# EAGLE board ALU (EAGLE 9.6.2)
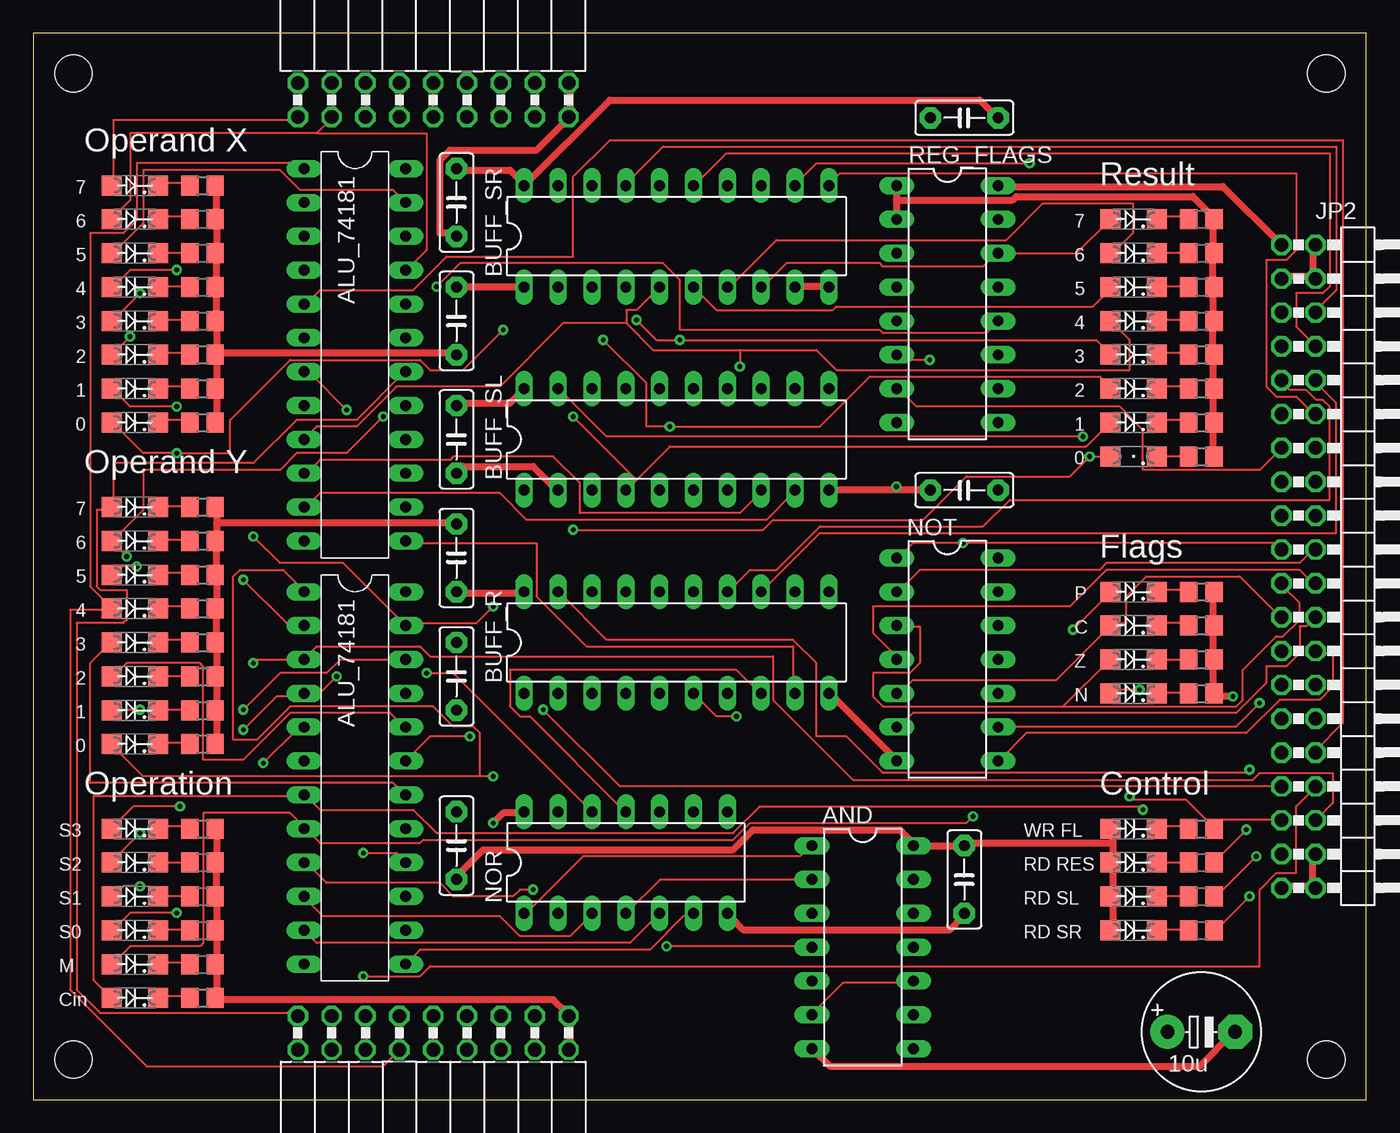
[diagram p0: board, top side]
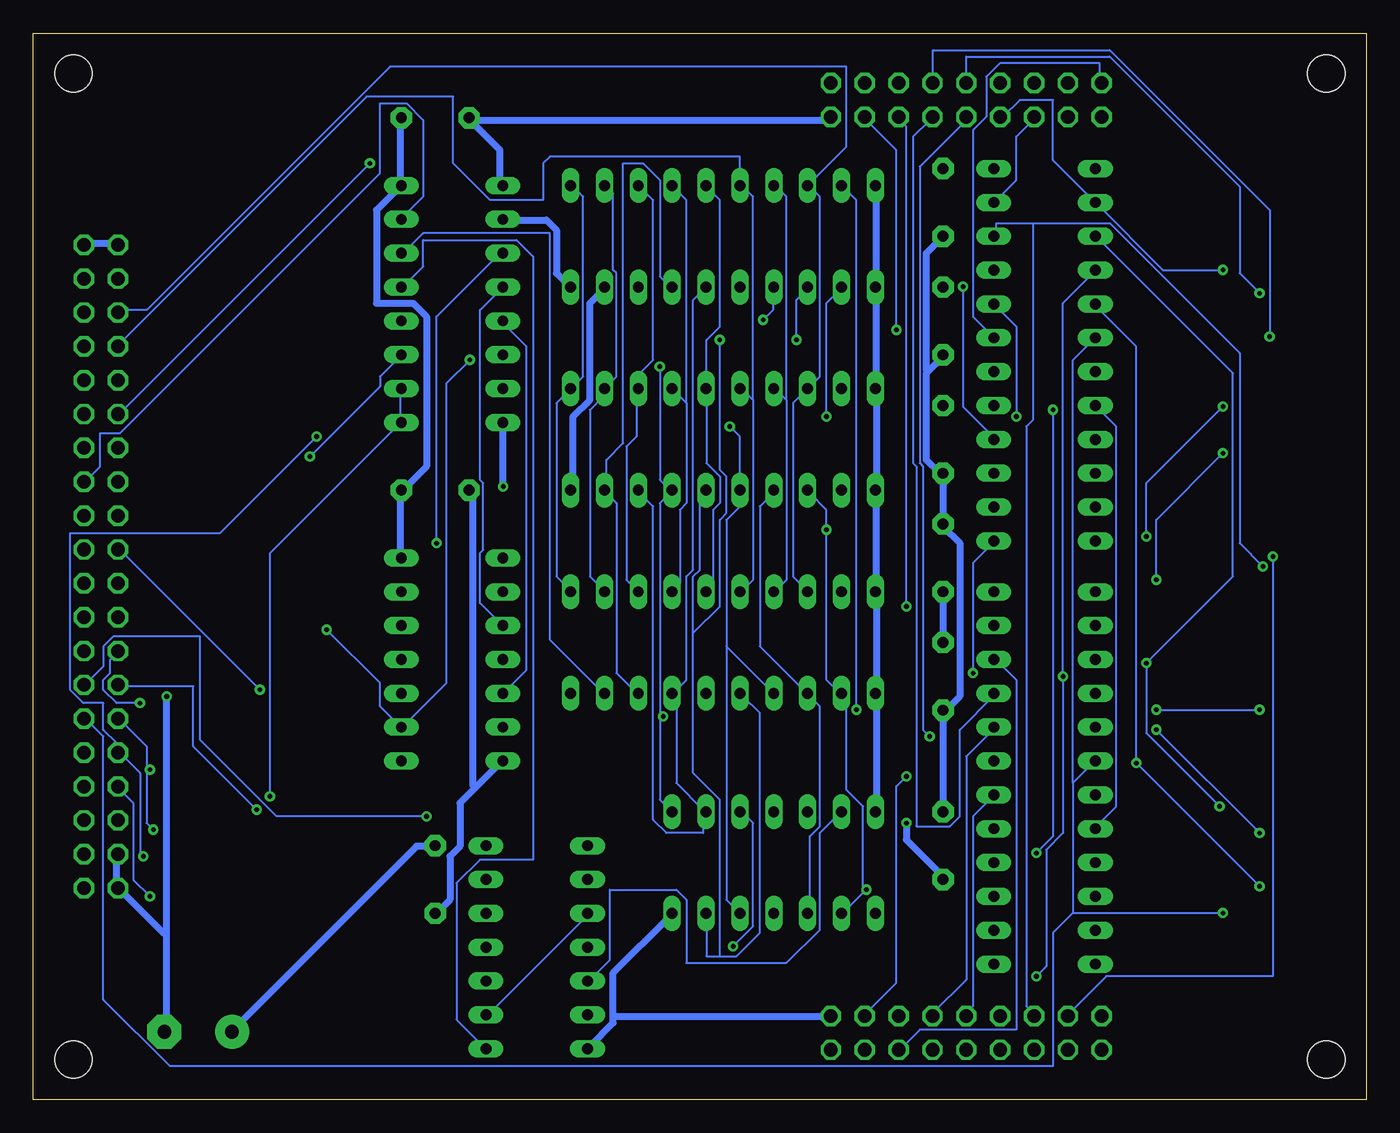
[diagram p1: board, bottom side, seen from below]

Size 100 x 80 mm. Coordinates in mm from the lower left corner, seen from the top.
Outline: 0,0 100,0 100,80 0,80 0,0
Copper layers (1*16): Top 0.035mm / dielectric 1.5mm / Bottom 0.035mm
Design rules "default": minimum track width 6mil, minimum drill 0.35mm, track to track 6mil, track to pad 6mil, pad to pad 6mil, via to via 6mil, smd to smd 6mil, copper to edge 40mil, drill to drill 6mil, minimum pad ring 10mil, minimum via ring 8mil, stop-mask expansion 4mil, vias tented up to drill 0mil, thermal gap 10mil
Net classes: 1 supply: width 0.508 mm
Holes 2.8 mm at 3,77 97,77 3,3 97,3

## Footprints (pad centres in the part's own frame; a part is rotated, then mirrored left to right if it is on the bottom)
ALU_74181 = drill 0.813 pad 1.321 long: A0 -3.81,11.43; A1 3.81,11.43; A2 3.81,6.35; A3 3.81,1.27; A=B 3.81,-11.43; B0 -3.81,13.97; B1 3.81,8.89; B2 3.81,3.81; B3 3.81,-1.27; CN -3.81,-1.27; COUT 3.81,-6.35; F0 -3.81,-6.35; F1 -3.81,-8.89; F2 -3.81,-11.43; F3 3.81,-13.97; G 3.81,-3.81; GND -3.81,-13.97; M -3.81,-3.81; P 3.81,-8.89; S0 -3.81,1.27; S1 -3.81,3.81; S2 -3.81,6.35; S3 -3.81,8.89; VCC 3.81,13.97
DIL14 = drill 0.813 long: 1 -7.62,-3.81; 2 -5.08,-3.81; 3 -2.54,-3.81; 4 0,-3.81; 5 2.54,-3.81; 6 5.08,-3.81; 7 7.62,-3.81; 8 7.62,3.81; 9 5.08,3.81; 10 2.54,3.81; 11 0,3.81; 12 -2.54,3.81; 13 -5.08,3.81; 14 -7.62,3.81
FE09-2W = drill 1.016 octagon: 1 -10.16,1.27; 2 -10.16,-1.27; 3 -7.62,1.27; 4 -7.62,-1.27; 5 -5.08,1.27; 6 -5.08,-1.27; 7 -2.54,1.27; 8 -2.54,-1.27; 9 0,1.27; 10 0,-1.27; 11 2.54,1.27; 12 2.54,-1.27; 13 5.08,1.27; 14 5.08,-1.27; 15 7.62,1.27; 16 7.62,-1.27; 17 10.16,1.27; 18 10.16,-1.27
DIL20 = drill 0.813 long: 1 -11.43,-3.81; 2 -8.89,-3.81; 3 -6.35,-3.81; 4 -3.81,-3.81; 5 -1.27,-3.81; 6 1.27,-3.81; 7 3.81,-3.81; 8 6.35,-3.81; 9 8.89,-3.81; 10 11.43,-3.81; 11 11.43,3.81; 12 8.89,3.81; 13 6.35,3.81; 14 3.81,3.81; 15 1.27,3.81; 16 -1.27,3.81; 17 -3.81,3.81; 18 -6.35,3.81; 19 -8.89,3.81; 20 -11.43,3.81
E5-8,5 = drill 1.016 pad 2.54: + -2.54,0 | drill 1.016 pad 2.54 octagon: - 2.54,0
C5B2.5 = drill 0.813 pad 1.6 octagon: 1 -2.54,0; 2 2.54,0
2X20/90 = drill 1.016 octagon: 1 -24.13,-6.35; 2 -24.13,-3.81; 3 -21.59,-6.35; 4 -21.59,-3.81; 5 -19.05,-6.35; 6 -19.05,-3.81; 7 -16.51,-6.35; 8 -16.51,-3.81; 9 -13.97,-6.35; 10 -13.97,-3.81; 11 -11.43,-6.35; 12 -11.43,-3.81; 13 -8.89,-6.35; 14 -8.89,-3.81; 15 -6.35,-6.35; 16 -6.35,-3.81; 17 -3.81,-6.35; 18 -3.81,-3.81; 19 -1.27,-6.35; 20 -1.27,-3.81; 21 1.27,-6.35; 22 1.27,-3.81; 23 3.81,-6.35; 24 3.81,-3.81; 25 6.35,-6.35; 26 6.35,-3.81; 27 8.89,-6.35; 28 8.89,-3.81; 29 11.43,-6.35; 30 11.43,-3.81; 31 13.97,-6.35; 32 13.97,-3.81; 33 16.51,-6.35; 34 16.51,-3.81; 35 19.05,-6.35; 36 19.05,-3.81; 37 21.59,-6.35; 38 21.59,-3.81; 39 24.13,-6.35; 40 24.13,-3.81
SML1206 = smd 1.5 x 1.5: A 1.75,0; C -1.75,0
R0805 = smd 1.3 x 1.5: 1 -0.95,0; 2 0.95,0
DIL16 = drill 0.813 long: 1 -8.89,-3.81; 2 -6.35,-3.81; 3 -3.81,-3.81; 4 -1.27,-3.81; 5 1.27,-3.81; 6 3.81,-3.81; 7 6.35,-3.81; 8 8.89,-3.81; 9 8.89,3.81; 10 6.35,3.81; 11 3.81,3.81; 12 1.27,3.81; 13 -1.27,3.81; 14 -3.81,3.81; 15 -6.35,3.81; 16 -8.89,3.81

## Placement (x,y rotation side)
ALU0  ALU_74181  [ALU_74181]  24.13,24.13 0 top
ALU1  ALU_74181  [ALU_74181]  24.13,55.88 0 top
AND  74LS08N  [DIL14]  62.23,11.43 270 top
BOTTOM  [FE09-2W]  30,5 0 top
BUFF_R  74LS245N  [DIL20]  48.26,34.29 0 top
BUFF_SL  74LS245N  [DIL20]  48.26,49.53 0 top
BUFF_SR  74LS245N  [DIL20]  48.26,64.77 0 top
C1  10u  [E5-8,5]  87.63,5.08 0 top
C2  [C5B2.5]  31.75,67.31 270 top
C3  [C5B2.5]  69.85,73.66 180 top
C4  [C5B2.5]  69.85,45.72 180 top
C5  [C5B2.5]  31.75,19.05 90 top
C6  [C5B2.5]  31.75,58.42 270 top
C7  [C5B2.5]  31.75,40.64 90 top
C8  [C5B2.5]  69.85,16.51 270 top
C9  [C5B2.5]  31.75,31.75 270 top
C10  [C5B2.5]  31.75,49.53 270 top
JP2  [2X20/90]  100,40 270 top
LED1  [SML1206]  7.62,50.8 180 top
LED2  [SML1206]  7.62,53.34 180 top
LED3  [SML1206]  7.62,55.88 180 top
LED4  [SML1206]  7.62,58.42 180 top
LED5  [SML1206]  7.62,60.96 180 top
LED6  [SML1206]  7.62,63.5 180 top
LED7  [SML1206]  7.62,66.04 180 top
LED8  [SML1206]  7.62,68.58 180 top
LED9  [SML1206]  7.62,26.67 180 top
LED10  [SML1206]  7.62,29.21 180 top
LED11  [SML1206]  7.62,31.75 180 top
LED12  [SML1206]  7.62,34.29 180 top
LED13  [SML1206]  7.62,36.83 180 top
LED14  [SML1206]  7.62,39.37 180 top
LED15  [SML1206]  7.62,41.91 180 top
LED16  [SML1206]  7.62,44.45 180 top
LED17  [SML1206]  82.55,48.26 180 top
LED18  [SML1206]  82.55,50.8 180 top
LED19  [SML1206]  82.55,53.34 180 top
LED20  [SML1206]  82.55,55.88 180 top
LED21  [SML1206]  82.55,58.42 180 top
LED22  [SML1206]  82.55,60.96 180 top
LED23  [SML1206]  82.55,63.5 180 top
LED24  [SML1206]  82.55,66.04 180 top
LED25  [SML1206]  82.55,30.48 180 top
LED26  [SML1206]  82.55,33.02 180 top
LED27  [SML1206]  82.55,35.56 180 top
LED28  [SML1206]  82.55,38.1 180 top
LED29  [SML1206]  7.62,12.7 180 top
LED30  [SML1206]  7.62,15.24 180 top
LED31  [SML1206]  7.62,17.78 180 top
LED32  [SML1206]  7.62,20.32 180 top
LED33  [SML1206]  7.62,10.16 180 top
LED34  [SML1206]  82.55,20.32 180 top
LED35  [SML1206]  82.55,17.78 180 top
LED36  [SML1206]  7.62,7.62 180 top
LED37  [SML1206]  82.55,15.24 180 top
LED38  [SML1206]  82.55,12.7 180 top
NOR  74LS02N  [DIL14]  44.45,17.78 0 top
NOT  74LS04N  [DIL14]  68.58,33.02 270 top
R1  [R0805]  12.7,50.8 0 top
R2  [R0805]  12.7,53.34 0 top
R3  [R0805]  12.7,55.88 0 top
R4  [R0805]  12.7,58.42 0 top
R5  [R0805]  12.7,60.96 0 top
R6  [R0805]  12.7,63.5 0 top
R7  [R0805]  12.7,66.04 0 top
R8  [R0805]  12.7,68.58 0 top
R9  [R0805]  12.7,26.67 0 top
R10  [R0805]  12.7,29.21 0 top
R11  [R0805]  12.7,31.75 0 top
R12  [R0805]  12.7,34.29 0 top
R13  [R0805]  12.7,36.83 0 top
R14  [R0805]  12.7,39.37 0 top
R15  [R0805]  12.7,41.91 0 top
R16  [R0805]  12.7,44.45 0 top
R17  [R0805]  87.63,48.26 0 top
R18  [R0805]  87.63,50.8 0 top
R19  [R0805]  87.63,53.34 0 top
R20  [R0805]  87.63,55.88 0 top
R21  [R0805]  87.63,58.42 0 top
R22  [R0805]  87.63,60.96 0 top
R23  [R0805]  87.63,63.5 0 top
R24  [R0805]  87.63,66.04 0 top
R25  [R0805]  87.63,30.48 0 top
R26  [R0805]  87.63,33.02 0 top
R27  [R0805]  87.63,35.56 0 top
R28  [R0805]  87.63,38.1 0 top
R29  [R0805]  12.7,12.7 0 top
R30  [R0805]  12.7,15.24 0 top
R31  [R0805]  12.7,17.78 0 top
R32  [R0805]  12.7,20.32 0 top
R33  [R0805]  12.7,10.16 0 top
R34  [R0805]  87.63,20.32 0 top
R35  [R0805]  87.63,17.78 0 top
R36  [R0805]  12.7,7.62 0 top
R37  [R0805]  87.63,15.24 0 top
R38  [R0805]  87.63,12.7 0 top
REG_FLAGS  74LS173N  [DIL16]  68.58,59.69 270 top
TOP  [FE09-2W]  30,75 180 top

## Library data of the parts
ALU0 ALU1 = IsaacAlonso
AND BUFF_R BUFF_SL BUFF_SR NOR NOT REG_FLAGS = 74xx-eu
BOTTOM TOP = con-lsta; OC_FARNELL: unknown; OC_NEWARK: unknown
C1 = rcl; SPICEPREFIX: C
C2-C10 = capacitor-wima
JP2 = pinhead
LED1-LED38 = led
R1-R38 = rcl; SPICEPREFIX: R

## Nets
!RD_ALU: BUFF_R.19 JP2.29 R35.2
!RD_SL: BUFF_SL.19 JP2.31 R37.2
!RD_SR: BUFF_SR.19 JP2.33 R38.2
!WR_FL: JP2.35 R34.2 REG_FLAGS.9 REG_FLAGS.10
A0: ALU0.A0 LED1.A TOP.3 TOP.4
A1: ALU0.A1 LED2.A TOP.5 TOP.6
A2: ALU0.A2 LED3.A TOP.7 TOP.8
A3: ALU0.A3 LED4.A TOP.9 TOP.10
A4: ALU1.A0 LED5.A TOP.11 TOP.12
A5: ALU1.A1 LED6.A TOP.13 TOP.14
A6: ALU1.A2 LED7.A TOP.15 TOP.16
A7: ALU1.A3 LED8.A TOP.17 TOP.18
B0: ALU0.B0 BOTTOM.15 BOTTOM.16 LED9.A
B1: ALU0.B1 BOTTOM.13 BOTTOM.14 LED10.A
B2: ALU0.B2 BOTTOM.11 BOTTOM.12 LED11.A
B3: ALU0.B3 BOTTOM.9 BOTTOM.10 LED12.A
B4: ALU1.B0 BOTTOM.7 BOTTOM.8 LED13.A
B5: ALU1.B1 BOTTOM.5 BOTTOM.6 LED14.A
B6: ALU1.B2 BOTTOM.3 BOTTOM.4 LED15.A
B7: ALU1.B3 BOTTOM.1 BOTTOM.2 LED16.A
BUS0: BUFF_R.18 BUFF_SL.18 BUFF_SR.18 JP2.5
BUS1: BUFF_R.17 BUFF_SL.17 BUFF_SR.17 JP2.6
BUS2: BUFF_R.16 BUFF_SL.16 BUFF_SR.16 JP2.7
BUS3: BUFF_R.15 BUFF_SL.15 BUFF_SR.15 JP2.8
BUS4: BUFF_R.14 BUFF_SL.14 BUFF_SR.14 JP2.9
BUS5: BUFF_R.13 BUFF_SL.13 BUFF_SR.13 JP2.10
BUS6: BUFF_R.12 BUFF_SL.12 BUFF_SR.12 JP2.11
BUS7: BUFF_R.11 BUFF_SL.11 BUFF_SR.11 JP2.12
C_OUT: ALU1.COUT REG_FLAGS.12
CIN: ALU0.CN JP2.27 LED36.A
CLK: JP2.13 REG_FLAGS.7
FL_C: JP2.23 LED27.A NOT.5 REG_FLAGS.5
FL_N: JP2.19 LED25.A NOT.1 REG_FLAGS.3
FL_P: JP2.25 LED28.A NOT.9 REG_FLAGS.6
FL_Z: JP2.21 LED26.A NOT.3 REG_FLAGS.4
GND [supply]: AND.7 BOTTOM.17 BOTTOM.18 BUFF_R.10 BUFF_SL.2 BUFF_SL.10 BUFF_SR.9 BUFF_SR.10 C1.- C2.2 C3.2 C4.2 C5.2 C6.2 C7.2 C8.2 C9.2 C10.2 JP2.37 JP2.38 JP2.39 JP2.40 NOR.7 NOT.7 R1.2 R2.2 R3.2 R4.2 R5.2 R6.2 R7.2 R8.2 R9.2 R10.2 R11.2 R12.2 R13.2 R14.2 R15.2 R16.2 R17.2 R18.2 R19.2 R20.2 R21.2 R22.2 R23.2 R24.2 R25.2 R26.2 R27.2 R28.2 R29.2 R30.2 R31.2 R32.2 R33.2 R36.2 REG_FLAGS.1 REG_FLAGS.2 REG_FLAGS.8 TOP.1 TOP.2
ICLK: JP2.14
IFL_C: JP2.24 NOT.6
IFL_N: JP2.20 NOT.2
IFL_P: JP2.26 NOT.8
IFL_Z: JP2.22 NOT.4
IRST: JP2.16 REG_FLAGS.15
M: ALU0.M ALU1.M JP2.28 LED33.A
N$1: ALU0.COUT ALU1.CN
N$2: AND.1 NOR.1
N$3: AND.2 NOR.4
N$4: AND.4 NOR.10
N$5: AND.5 NOR.13
N$6: AND.6 AND.10
N$7: AND.3 AND.9
N$8: LED29.C R29.1
N$9: LED1.C R1.1
N$10: LED2.C R2.1
N$11: LED3.C R3.1
N$12: LED4.C R4.1
N$13: LED5.C R5.1
N$14: LED6.C R6.1
N$15: LED7.C R7.1
N$16: LED8.C R8.1
N$17: LED30.C R30.1
N$18: LED9.C R9.1
N$19: LED10.C R10.1
N$20: LED11.C R11.1
N$21: LED12.C R12.1
N$22: LED13.C R13.1
N$23: LED14.C R14.1
N$24: LED15.C R15.1
N$25: LED16.C R16.1
N$26: LED31.C R31.1
N$27: LED17.C R17.1
N$28: LED18.C R18.1
N$29: LED19.C R19.1
N$30: LED20.C R20.1
N$31: LED21.C R21.1
N$32: LED22.C R22.1
N$33: LED23.C R23.1
N$34: LED24.C R24.1
N$35: LED25.C R25.1
N$36: LED26.C R26.1
N$37: LED27.C R27.1
N$38: LED28.C R28.1
N$39: LED32.C R32.1
N$40: LED33.C R33.1
N$41: LED34.C R34.1
N$42: LED35.C R35.1
N$43: LED36.C R36.1
N$44: LED37.C R37.1
N$45: LED38.C R38.1
R0: ALU0.F0 BUFF_R.2 BUFF_SL.3 LED17.A NOR.2 REG_FLAGS.11
R1: ALU0.F1 BUFF_R.3 BUFF_SL.4 BUFF_SR.2 LED18.A NOR.3
R2: ALU0.F2 BUFF_R.4 BUFF_SL.5 BUFF_SR.3 LED19.A NOR.5
R3: ALU0.F3 BUFF_R.5 BUFF_SL.6 BUFF_SR.4 LED20.A NOR.6
R4: ALU1.F0 BUFF_R.6 BUFF_SL.7 BUFF_SR.5 LED21.A NOR.8
R5: ALU1.F1 BUFF_R.7 BUFF_SL.8 BUFF_SR.6 LED22.A NOR.9
R6: ALU1.F2 BUFF_R.8 BUFF_SL.9 BUFF_SR.7 LED23.A NOR.11
R7: ALU1.F3 BUFF_R.9 BUFF_SR.8 LED24.A NOR.12 REG_FLAGS.14
RST: JP2.15
S0: ALU0.S0 ALU1.S0 JP2.30 LED29.A
S1: ALU0.S1 ALU1.S1 JP2.32 LED30.A
S2: ALU0.S2 ALU1.S2 JP2.34 LED31.A
S3: ALU0.S3 ALU1.S3 JP2.36 LED32.A
VCC [supply]: AND.14 BUFF_R.1 BUFF_R.20 BUFF_SL.1 BUFF_SL.20 BUFF_SR.1 BUFF_SR.20 C1.+ C2.1 C3.1 C4.1 C5.1 C6.1 C7.1 C8.1 C9.1 C10.1 JP2.1 JP2.2 JP2.3 JP2.4 LED34.A LED35.A LED37.A LED38.A NOR.14 NOT.14 REG_FLAGS.16
Z: AND.8 REG_FLAGS.13

## Tracks (layer width: path | path; a pad name or v marks a point on that pad's centre or on a via)
!RD_ALU  (via drill 0.35)
  Top 0.152: v91,20.25 88.75,18 R35.2 | v91.25,24.75 91,24.5 63.75,24.5 61,27.25 58.75,27.25 58.75,32.75 57,34.5 43,34.5 39.5,38 BUFF_R.19
  Bottom 0.152: v91,20.25 91.5,20.75 91.5,24.75 | 91.5,24.75 91.5,26.5 93.5,28.5 JP2.29 | 91.5,24.75 v91.25,24.75
!RD_SL  (via drill 0.35)
  Top 0.152: v91.75,18.25 88.75,15.25 R37.2 | v78.75,49.75 43,49.75 39.5,53.25 BUFF_SL.19
  Bottom 0.152: v91.75,18.25 92,18.5 92,24.5 93.5,26 JP2.31 93.75,26.25 93.75,26.75 94.75,27.75 94.75,29.75 96.25,29.75 97.25,30.75 97.25,42.5 86,42.5 v78.75,49.75
!RD_SR  (via drill 0.35)
  Top 0.152: v91.25,15.25 88.75,12.75 R38.2 | v38.25,29.25 44,23.5 93.5,23.5 JP2.33
  Bottom 0.152: v91.25,15.25 92.5,16.5 92.5,22.25 93.5,23.25 JP2.33 | v38.25,29.25 38.25,67.5 39.25,68.5 BUFF_SR.19
!WR_FL  (via drill 0.35)
  Top 0.152: JP2.35 93.5,21 89.25,21 88.75,20.5 R34.2 88.5,20.5 86.5,22.5 82.5,22.5 v82.25,22.75
  Bottom 0.152: REG_FLAGS.10 72.5,53.25 72.5,51 REG_FLAGS.9 72.5,50.75 82.25,41 v82.25,22.75
A0  (via drill 0.35)
  Top 0.152: TOP.3 37.75,73.75 37.75,76.25 TOP.4 | v15.75,39 19,35.75 20.25,35.75 ALU0.A0 | LED1.A 6,50.75 8.25,48.5 v10.75,48.5 14.75,48.5 14.75,51 19.25,55.5 29,55.5 29.75,54.75 32.25,54.75 v35.25,57.75
  Bottom 0.152: v10.75,48.5 15.75,43.5 v15.75,39 | v35.25,57.75 35.25,71.25 37.5,73.5 TOP.3
A1  (via drill 0.35)
  Top 0.152: TOP.5 35.25,73.75 35.25,76.25 TOP.6 | v10.75,52 7.25,52 6,53.25 LED2.A | v16.5,42.25 18.5,40.25 23.25,40.25 ALU0.A1 28,35.75 33.25,35.75 v34.5,37
  Bottom 0.152: v10.75,52 16.5,46.25 v16.5,42.25 | v34.5,37 34.5,73 35,73.5 TOP.5
A2  (via drill 0.35)
  Top 0.152: v7.25,57.25 6,56 LED3.A | TOP.8 32.75,76.25 32.75,73.75 TOP.7
  Bottom 0.152: v7.25,57.25 7.25,66.75 19.25,78.75 32.5,78.75 32.5,76.5 TOP.8 | ALU0.A2 28,30.25 30.5,27.75 30.5,21.25 31.25,20.5 33.75,20.5 33.75,47.5 34,47.75 34,72.25 32.75,73.5 TOP.7
A3  (via drill 0.35)
  Top 0.152: v8,60.5 6,58.5 LED4.A | v32.75,27.25 29.75,27.25 28,25.5 ALU0.A3 | TOP.9 TOP.10
  Bottom 0.152: v8,60.5 9.5,62 9.5,68.5 19.25,78.25 30,78.25 TOP.10 | v32.75,27.25 33.25,27.75 33.25,47.5 33.5,47.75 33.5,70 30,73.5 TOP.9
A4  (via drill 0.35)
  Top 0.152: TOP.11 27.5,73.75 27.5,76.25 TOP.12 | v10.75,62.25 7.25,62.25 6,61 LED5.A
  Bottom 0.152: v10.75,62.25 15.25,62.25 20.25,67.25 ALU1.A0 20.5,67.5 23.5,70.5 23.5,75 26,75 27.25,73.75 TOP.11
A5
  Top 0.152: TOP.13 25,73.75 25,76.25 TOP.14 | ALU1.A1 27,68.25 20,68.25 18.5,69.75 8.25,69.75 8.25,65.75 6,63.5 LED6.A
  Bottom 0.152: ALU1.A1 26.25,69 26.25,72.25 25,73.5 TOP.13
A6
  Top 0.152: 21.25,72.5 7.25,72.5 7.25,67.5 6,66.25 LED7.A | 21.25,72.5 22.25,73.5 TOP.15 22.5,73.75 22.5,76.25 TOP.16 | 21.25,72.5 29.5,72.5 29.5,63.75 28,62.25 ALU1.A2
A7
  Top 0.152: LED8.A 6,68.75 6,73.5 19.75,73.5 TOP.17 20,73.75 20,76.25 TOP.18
  Bottom 0.152: ALU1.A3 28,57.25 29.5,58.75 29.5,72.75 28.5,73.75 28.5,76.75 27.5,77.75 20,77.75 20,76.5 TOP.18
B0  (via drill 0.35)
  Top 0.152: v34.5,24.25 33.5,24.25 | 33.5,24.25 8.25,24.25 6,26.5 LED9.A | 33.5,24.25 33.5,27.5 33,28 31.5,28 30,29.5 19.25,29.5 16.75,27 15,27 15,39.25 15.5,39.75 18.75,39.75 20.25,38.25 ALU0.B0 | BOTTOM.16 37.75,3.75 37.75,6.25 BOTTOM.15
  Bottom 0.152: v34.5,24.25 35.25,23.5 35.25,8.75 37.5,6.5 BOTTOM.15
B1  (via drill 0.35)
  Top 0.152: BOTTOM.14 35.25,3.75 35.25,6.25 BOTTOM.13 | v8,29.25 6,29.25 LED10.A | v15.75,29.25 18.5,32 22,32 23,33 27.75,33 ALU0.B1
  Bottom 0.152: v15.75,29.25 v8,29.25 | BOTTOM.14 35,3.75 33.5,5.25 26.25,5.25 26.25,31.5 27.75,33 ALU0.B1
B2
  Top 0.152: BOTTOM.12 32.75,3.75 32.75,6.25 BOTTOM.11 | LED11.A 6,31.75 7,32.75 12.5,32.75 12.75,32.5 12.75,25.5 15.75,25.5 19.25,29 26.75,29 27.75,28 ALU0.B2
  Bottom 0.152: BOTTOM.11 32.5,6.5 30,9 30,25.75 28,27.75 ALU0.B2
B3
  Top 0.152: BOTTOM.9 BOTTOM.10 | LED12.A 5.75,34.25 4.25,32.75 4.25,23.75 27,23.75 27.75,23 ALU0.B3
  Bottom 0.152: BOTTOM.9 30,6.5 29.5,7 29.5,21.25 28,22.75 ALU0.B3
B4
  Top 0.152: BOTTOM.7 27.5,6.25 27.5,3.75 BOTTOM.8 27.25,3.5 26.25,2.5 8.5,2.5 2.75,8.25 2.75,36.75 5.75,36.75 LED13.A 5.75,37 4.25,38.5 4.25,65 6.75,65 7.75,66 7.75,70.25 20,70.25 20.25,70 ALU1.B0
B5  (via drill 0.35)
  Top 0.152: BOTTOM.6 25,3.75 25,6.25 BOTTOM.5 | LED14.A 6.5,40 v7.75,40
  Bottom 0.152: v7.75,40 9.5,41.75 9.5,56 19.25,65.75 25,65.75 | 25,65.75 27.75,65.75 27.75,65 ALU1.B1 | 25,65.75 25,51 25.5,50.5 25.5,7 25,6.5 BOTTOM.5
B6  (via drill 0.35)
  Top 0.152: BOTTOM.4 22.5,3.75 22.5,6.25 BOTTOM.3 | v26.25,51.25 23.5,48.5 19.75,48.5 18.5,47.25 8.25,47.25 8.25,44.25 6,42 LED15.A 6,41.75 v7,40.75
  Bottom 0.152: v26.25,51.25 26.25,58 ALU1.B2 | v7,40.75 7,9.25 19.5,9.25 22.25,6.5 BOTTOM.3
B7
  Top 0.152: BOTTOM.2 20,3.75 20,6.25 BOTTOM.1 19.75,6.5 5,6.5 3.25,8.25 3.25,35.75 6.75,35.75 7,36 7,38.25 5,38.25 4.75,38.5 4.75,44.25 5.75,44.25 LED16.A 6,44.5 6,47.75 16.5,47.75 19.75,51 24.25,51 27.75,54.5 ALU1.B3
BUS0
  Bottom 0.152: BUFF_R.18 42,38.25 43,39.25 43,52.25 BUFF_SL.18 41,54.25 41,67.75 41.75,68.5 BUFF_SR.18 41.75,68.75 39,71.5 39,77.5 73.25,77.5 91.5,59.25 93.5,59.25 JP2.5
BUS1
  Top 0.152: JP2.6 96.25,59.25 97.75,60.75 97.75,71.5 47.25,71.5 44.5,68.75 BUFF_SR.17
  Bottom 0.152: 43.5,52.5 43.5,39 44.25,38.25 BUFF_R.17 | 43.5,52.5 44.25,53.25 BUFF_SL.17 | 43.5,52.5 43.5,67.75 44.25,68.5 BUFF_SR.17
BUS2
  Bottom 0.152: 46,52.5 46,39 46.75,38.25 BUFF_R.16 | 46,52.5 46.75,53.25 BUFF_SL.16 | 46,52.5 46,67.75 46.75,68.5 BUFF_SR.16 47,68.75 47,70.75 61.25,70.75 61.75,70.25 61.75,67.5 65.75,67.5 68.5,70.25 68.5,75.25 75,75.25 93.5,56.75 JP2.7
BUS3
  Top 0.152: JP2.8 96,56.75 94.75,58 94.75,60.5 96.75,60.5 97.25,61 97.25,71 52,71 49.75,68.75 BUFF_SR.15
  Bottom 0.152: BUFF_R.15 49.5,38.25 49,38.75 49,44.25 48.5,44.75 48.5,46.75 49.5,47.75 49.5,53.25 BUFF_SL.15 49.5,53.5 49.5,57 48.5,58 48.5,67.5 49.5,68.5 BUFF_SR.15
BUS4
  Top 0.152: JP2.9 93.75,53.75 94.25,53.25 95.5,53.25 96.25,52.5 96.75,52.5 97.25,52 97.25,45 73.25,45 71.25,43 59,43 55.75,39.75 53.75,39.75 52.25,38.25 BUFF_R.14
  Bottom 0.152: 51,52.25 51,44.75 51.5,44.25 51.5,38.75 52,38.25 BUFF_R.14 | 51,52.25 52,53.25 BUFF_SL.14 | 51,52.25 51,67.5 52,68.5 BUFF_SR.14
BUS5
  Top 0.152: JP2.10 96.25,53.75 97.75,52.25 97.75,42.5 59,42.5 54.75,38.25 BUFF_R.13
  Bottom 0.152: BUFF_R.13 54.75,38.25 55.5,39 55.5,49 54.75,49.75 54.75,53.25 BUFF_SL.13 54.5,53.5 54.5,54.5 53.5,55.5 53.5,67.5 54.5,68.5 BUFF_SR.13
BUS6  (via drill 0.35)
  Top 0.152: v74.75,70.25 58.75,70.25 57.25,68.75 BUFF_SR.12
  Bottom 0.152: BUFF_R.12 57.25,38.25 58.25,39.25 58.25,51.75 57.25,52.75 57.25,53.25 BUFF_SL.12 57,53.5 56.25,54.25 56.25,62 56.5,62.25 56.5,68 57,68.5 BUFF_SR.12 | v74.75,70.25 93.5,51.5 JP2.11
BUS7
  Top 0.152: JP2.12 96,51.5 94.75,52.75 93.25,52.75 92.5,53.5 92.5,63 94,63 94.75,63.75 94.75,69.5 60.5,69.5 59.75,68.75 BUFF_SR.11
  Bottom 0.152: BUFF_R.11 59.75,38.25 60.75,39.25 60.75,52.25 59.75,53.25 BUFF_SL.11 59.5,53.5 58.75,54.25 58.75,67.75 59.5,68.5 BUFF_SR.11
C_OUT  (via drill 0.35)
  Top 0.152: v30.25,61 32,62.75 47.25,62.75 48.5,61.5 48.5,57.75 63.5,57.75 63.75,57.5 71.5,57.5 72.25,58.25 REG_FLAGS.12
  Bottom 0.152: v30.25,61 30.25,52 28,49.75 ALU1.COUT
CIN  (via drill 0.35)
  Top 0.152: LED36.A 5.75,7.75 4.5,9 4.5,22.75 20.25,22.75 ALU0.CN 20.5,22.75 21.5,21.75 28.5,21.75 30.25,20 52.5,20 54.5,22 83,22 v83.25,21.75
  Bottom 0.152: v83.25,21.75 88,26.5 88,31 93.5,31 JP2.27
CLK
  Top 0.152: REG_FLAGS.7 65,53.25 66.25,52 81.5,52 83.25,50.25 83.25,47.25 92,47.25 93.5,48.75 JP2.13
FL_C
  Top 0.152: NOT.5 65,30.5 66,31.5 76.75,31.5 80.75,35.5 LED27.A 81,35.75 82,35.75 82,37.75 83.5,39.25 90.5,39.25 93.5,36.25 JP2.23
  Bottom 0.152: NOT.5 63,32.25 63,56.5 64.75,58.25 REG_FLAGS.5
FL_N  (via drill 0.35)
  Top 0.152: v83,30.75 81.25,30.75 81,30.5 LED25.A | NOT.1 65,40.75 66,41.75 v69.75,41.75 93.25,41.75 93.5,41.5 JP2.19
  Bottom 0.152: v83,30.75 93.5,41.25 JP2.19 | v69.75,41.75 69.75,58.75 65,63.5 REG_FLAGS.3
FL_P  (via drill 0.35)
  Top 0.152: v78,35.25 80.75,38 LED28.A | v67.25,55.5 65.25,55.5 65,55.75 REG_FLAGS.6 | v92,29.75 90.25,28 72.5,28 NOT.9
  Bottom 0.152: v78,35.25 74,31.25 74,29.5 72.5,28 NOT.9 72.25,28 69,31.25 69,53.75 v67.25,55.5 | v92,29.75 93.75,29.75 94.75,30.75 94.75,31.5 94.25,32 94.25,33 93.75,33.5 JP2.25
FL_Z
  Top 0.152: 77.25,29.5 80.75,33 LED26.A | 77.25,29.5 63.75,29.5 63,30.25 63,32 65.75,32 66.5,32.75 66.5,35.5 65,35.5 NOT.3 | 77.25,29.5 90.25,29.5 90.75,30 90.75,32.25 93.25,34.75 93.75,34.75 95,36 95,37.25 93.75,38.5 JP2.21
  Bottom 0.152: REG_FLAGS.4 65,60.75 66.5,59.25 66.5,46.5 66.25,46.25 66.25,41.25 66.5,41 66.5,37.25 65,35.75 NOT.3
GND  (via drill 0.35)
  Top 0.508: R8.2 13.75,68.5 13.75,66.25 R7.2 13.75,66 13.75,63.5 R6.2 13.75,63.25 13.75,61 R5.2 13.75,60.75 13.75,58.5 R4.2 13.75,58.25 13.75,56 R3.2 | R1.2 13.75,51 13.75,53.25 R2.2 13.75,53.5 13.75,55.75 R3.2 | 13.75,43.25 13.75,44.25 R16.2 | 13.75,43.25 13.75,42 R15.2 13.75,41.75 13.75,39.5 R14.2 13.75,39.25 13.75,37 R13.2 13.75,36.75 13.75,34.5 R12.2 13.75,34.25 13.75,31.75 R11.2 13.75,31.5 13.75,29.25 R10.2 13.75,29 13.75,26.75 R9.2 | TOP.2 40.25,76.25 40.25,73.75 TOP.1 40,73.5 37.75,71.25 31.25,71.25 30.5,70.5 30.5,65 31.75,65 C2.2 | BUFF_SL.2 39.25,45.75 37.5,47.5 32.25,47.5 C10.2 | 13.75,43.25 31.75,43.25 C7.2 | R3.2 14,56 31.75,56 C6.2 | R17.2 88.5,48.5 88.5,50.75 R18.2 88.5,51 88.5,53.25 R19.2 88.5,53.5 88.5,55.75 R20.2 88.5,56 88.5,58.25 R21.2 88.5,58.5 88.5,60.75 R22.2 88.5,61 88.5,63.25 R23.2 88.5,63.5 88.5,66 R24.2 88.5,66.25 87,67.75 73.75,67.75 73.5,67.5 64.75,67.5 | BUFF_SR.9 57.25,61 59.5,61 BUFF_SR.10 | 64.75,67.5 64.75,68.5 REG_FLAGS.1 | 64.75,67.5 64.75,66.25 REG_FLAGS.2 | 64.75,45.75 67.25,45.75 C4.2 | 64.75,45.75 59.75,45.75 BUFF_SL.10 | v64.75,46 64.75,45.75 | NOT.7 64.75,25.5 60,30.25 59.75,30.25 BUFF_R.10 | JP2.39 93.75,16 96,16 JP2.40 96,16.25 96,18.25 JP2.38 | R28.2 88.5,38 88.5,35.75 R27.2 88.5,35.5 88.5,33.25 R26.2 88.5,33 88.5,30.5 R25.2 88.75,30.25 v90,30.25 | R32.2 13.75,20.25 13.75,18 R31.2 13.75,17.75 13.75,15.25 R30.2 13.75,15 13.75,12.75 R29.2 13.75,12.5 13.75,10.25 R33.2 13.75,10 13.75,7.75 R36.2 14,7.75 14.25,7.5 39,7.5 40,6.5 BOTTOM.17 40.25,6.25 40.25,3.75 BOTTOM.18 | C1.- 90,5 87.5,2.5 59.75,2.5 58.5,3.75 AND.7
  Top 0.508: C8.2 69.75,13.75 68.75,12.75 53.25,12.75 52.25,13.75 NOR.7
  Bottom 0.508: C5.2 C9.2 31.5,29.25 30.5,30.25 30.5,41.75 31.75,43 C7.2 C10.2 32,47 33,48 33,54.5 32.88,54.62 | 32.88,54.62 31.75,55.75 C6.2 | C2.2 31.75,64.75 33,63.5 33,54.75 32.88,54.62 | REG_FLAGS.1 65,68.75 65,71.25 67.25,73.5 C3.2 67,73.5 40.25,73.5 TOP.1 | BUFF_SR.10 59.75,61 60.75,62 60.75,65.25 61.5,66 64.75,66 REG_FLAGS.2 | v64.75,46 64.75,50.75 REG_FLAGS.8 | 66.88,23.38 65,25.25 NOT.7 | 66.88,23.38 68,22.25 68,19 68.75,18.25 68.75,15 69.75,14 C8.2 | C4.2 67.25,45.5 67,45.25 67,23.5 66.88,23.38 | JP2.37 93.75,18.25 93.75,16 JP2.39 93.5,15.75 90.25,12.5 90,12.5 | 90,12.5 90,5.25 C1.- | 90,12.5 v90,30.25 | 56.5,6.25 56.5,5.75 58.25,4 AND.7 | 56.5,6.25 56.5,9.5 52.25,13.75 NOR.7 | 56.5,6.25 40.25,6.25 BOTTOM.17 | BUFF_SR.9 57.25,60.75 58.25,59.75 58.25,52.5 59.5,51.25 59.5,45.75 BUFF_SL.10
IFL_C
  Top 0.152: JP2.24 95.5,35.5 95,35.5 95,33.5 94,32.5 92.5,32.5 92.5,31.25 90.25,29 66,29 65,28 NOT.6
IFL_N
  Top 0.152: NOT.2 65,38.25 66.5,39.75 80,39.75 80.5,40.25 95,40.25 96,41.25 JP2.20
IFL_P
  Top 0.152: NOT.8 72.5,25.5 74.5,27.5 91,27.5 93.5,30 96.5,30 97.5,31 97.5,33.5 96.25,33.5 JP2.26
IFL_Z
  Top 0.152: NOT.4 64.75,33.25 63,35 63,37 77.75,37 80.5,39.75 95,39.75 96,38.75 JP2.22
IRST
  Bottom 0.152: REG_FLAGS.15 72.25,66.25 70.75,67.75 70.75,73.5 72,74.75 74,74.75 74,69.5 93.5,50 95,50 95,47.5 96,46.5 JP2.16
M  (via drill 0.35)
  Top 0.152: LED33.A 6,10.25 7.25,11.5 12.5,11.5 12.75,11.75 12.75,21.5 19.25,21.5 20.25,20.5 ALU0.M 20.5,20.25 21.5,19.25 29,19.25 29.25,19.5 52.5,19.5 53.75,20.75 70,20.75 v70.5,21.25
  Bottom 0.152: ALU1.M 18.75,50.5 18.75,22 20.25,20.5 ALU0.M | v70.5,21.25 81.75,21.25 87.5,27 87.5,34.75 94,34.75 94.75,34 94.75,32.5 96,31.25 JP2.28
N$1  (via drill 0.35)
  Top 0.152: v24.75,18.5 27.25,18.5 27.75,18 ALU0.COUT | v23.5,51.75 20.75,54.5 20.5,54.5 ALU1.CN
  Bottom 0.152: v24.75,18.5 23.5,19.75 v23.5,51.75
N$2
  Top 0.152: NOR.1 37,14 41.25,18.25 57.5,18.25 58.25,19 AND.1
N$3
  Top 0.152: NOR.4 44.5,14 47,16.5 58.25,16.5 AND.2
N$4  (via drill 0.35)
  Top 0.152: v47.5,11.5 58.25,11.5 AND.4
  Bottom 0.152: v47.5,11.5 46,13 46,20.75 46.75,21.5 NOR.10
N$5
  Bottom 0.152: NOR.13 39.5,21.5 41,20 41,12.75 43.5,10.25 51,10.25 51,15 51.75,15.75 56.75,15.75 56.75,10.5 58.25,9 AND.5
N$6
  Top 0.152: AND.6 58.5,6.5 60.75,8.75 66,8.75 AND.10
N$7
  Bottom 0.152: AND.3 58.5,13.75 66,6.25 AND.9
N$8
  Top 0.152: LED29.C 9.5,12.75 11.75,12.75 R29.1
N$9
  Top 0.152: LED1.C 9.5,51 11.75,51 R1.1
N$10
  Top 0.152: LED2.C 9.5,53.5 11.75,53.5 R2.1
N$11
  Top 0.152: LED3.C 9.5,56 11.75,56 R3.1
N$12
  Top 0.152: LED4.C 9.5,58.5 11.75,58.5 R4.1
N$13
  Top 0.152: LED5.C 9.5,61 11.75,61 R5.1
N$14
  Top 0.152: R6.1 LED6.C
N$15
  Top 0.152: LED7.C 9.5,66.25 11.75,66.25 R7.1
N$16
  Top 0.152: LED8.C 9.5,68.75 11.75,68.75 R8.1
N$17
  Top 0.152: LED30.C 9.5,15.25 R30.1
N$18
  Top 0.152: LED9.C 9.5,26.75 11.75,26.75 R9.1
N$19
  Top 0.152: LED10.C 9.5,29.25 11.75,29.25 R10.1
N$20
  Top 0.152: R11.1 LED11.C
N$21
  Top 0.152: LED12.C 9.5,34.5 11.75,34.5 R12.1
N$22
  Top 0.152: LED13.C 9.5,37 11.75,37 R13.1
N$23
  Top 0.152: LED14.C 9.5,39.5 11.75,39.5 R14.1
N$24
  Top 0.152: LED15.C 9.5,42 11.75,42 R15.1
N$25
  Top 0.152: LED16.C 9.5,44.5 11.75,44.5 R16.1
N$26
  Top 0.152: LED31.C 9.5,17.75 11.75,17.75 R31.1
N$27
  Top 0.152: LED17.C 84.5,48.25 86.5,48.25 R17.1
N$28
  Top 0.152: LED18.C 84.5,51 86.5,51 R18.1
N$29
  Top 0.152: LED19.C 84.5,53.5 86.5,53.5 R19.1
N$30
  Top 0.152: LED20.C 84.5,56 86.5,56 R20.1
N$31
  Top 0.152: LED21.C 84.5,58.5 86.5,58.5 R21.1
N$32
  Top 0.152: LED22.C 84.5,61 86.5,61 R22.1
N$33
  Top 0.152: R23.1 LED23.C
N$34
  Top 0.152: LED24.C 84.5,66.25 86.5,66.25 R24.1
N$35
  Top 0.152: LED25.C 84.5,30.5 86.5,30.5 R25.1
N$36
  Top 0.152: LED26.C 84.5,33 86.5,33 R26.1
N$37
  Top 0.152: LED27.C 84.5,35.75 86.5,35.75 R27.1
N$38
  Top 0.152: LED28.C 84.5,38.25 86.5,38.25 R28.1
N$39
  Top 0.152: LED32.C 9.5,20.5 11.75,20.5 R32.1
N$40
  Top 0.152: LED33.C 9.5,10.25 11.75,10.25 R33.1
N$41
  Top 0.152: LED34.C 84.5,20.5 86.5,20.5 R34.1
N$42
  Top 0.152: LED35.C 84.5,17.75 86.5,17.75 R35.1
N$43
  Top 0.152: LED36.C 9.5,7.75 11.75,7.75 R36.1
N$44
  Top 0.152: LED37.C 84.5,15.25 86.5,15.25 R37.1
N$45
  Top 0.152: LED38.C 84.5,12.75 86.5,12.75 R38.1
R0  (via drill 0.35)
  Top 0.152: LED17.A 80.75,48.25 v79.25,48.25 77.75,46.75 70,46.75 66.75,43.5 55.5,43.5 54.75,42.75 v40.5,42.75 | v37.5,15.75 36.5,15.75 36,15.25 31.5,15.25 30.5,16.25 22,16.25 20.5,17.75 ALU0.F0
  Bottom 0.152: v79.25,48.25 74,53.5 74,54.25 72.5,55.75 REG_FLAGS.11 | 37.75,15.5 39.25,14 NOR.2 | 37.75,15.5 37.75,22 39,23.25 39,30 39.25,30.25 BUFF_R.2 39.5,30.5 40.5,31.5 v40.5,42.75 40.5,44.25 41.75,45.5 BUFF_SL.3 | 37.75,15.5 v37.5,15.75
R1  (via drill 0.35)
  Top 0.152: ALU0.F1 20.5,15 21.75,13.75 35,13.75 36.5,12.25 40.25,12.25 41.75,13.75 NOR.3 | LED18.A 79,49 47.75,49 45.25,46.5 | 45.25,46.5 44.5,45.75 BUFF_SL.4 | 45.25,46.5 v40.5,51.25
  Bottom 0.152: NOR.3 41.75,14 41.75,19.75 41,20.5 41,29.5 41.75,30.25 BUFF_R.3 42,30.5 45.5,34 45.5,44.5 44.5,45.5 BUFF_SL.4 | v40.5,51.25 40.5,59.75 39.5,60.75 BUFF_SR.2
R2  (via drill 0.35)
  Top 0.152: ALU0.F2 20.5,12.5 21.25,11.75 44.75,11.75 46.75,13.75 NOR.5 | LED19.A 80.75,53.5 80,54.25 62.75,54.25 59,50.5 v47.75,50.5 46,50.5 46,53.75 v42.75,57
  Bottom 0.152: v47.75,50.5 47,49.75 47,45.75 BUFF_SL.5 47,45.5 47,44.5 48,43.5 48,34 | 48,34 44.5,30.5 BUFF_R.4 | v42.75,57 42.75,60 42,60.75 BUFF_SR.3 | 48,34 48,15 47,14 NOR.5
R3  (via drill 0.35)
  Top 0.152: v45.25,58.5 46.75,57 v48.5,57 79.75,57 80.75,56 LED20.A | ALU0.F3 28,10.25 29,11.25 46.25,11.25 48.75,13.75 49.5,13.75 NOR.6
  Bottom 0.152: v45.25,58.5 44.5,59.25 44.5,60.75 BUFF_SR.4 | 48.5,10.75 49.5,10.75 49.5,13.75 NOR.6 | 48.5,10.75 47.25,10.75 45.5,12.5 45.5,29 46.75,30.25 BUFF_R.5 | BUFF_SL.6 50,45.25 50,39.75 50.5,39.25 50.5,35 | 50.5,35 50.5,24.5 48.5,22.5 48.5,10.75 | v48.5,57 48.5,47.25 48,46.75 48,44 48.5,43.5 48.5,37 50.5,35
R4  (via drill 0.35)
  Top 0.152: v52.75,28.75 51.25,28.75 49.75,30.25 BUFF_R.6 | 53,56.25 46.5,56.25 44.5,58.25 | 53,56.25 58.75,56.25 60.25,54.75 82.25,54.75 82.25,57 81,58.25 LED21.A | 44.5,58.25 44.5,59.25 45.25,59.25 46.75,60.75 BUFF_SR.5 | 44.5,58.25 39.75,58.25 35,53.5 27.25,53.5 24.25,50.5 21.25,50.5 20.5,49.75 ALU1.F0 | 53,56.25 v53,55
  Bottom 0.152: 53,28.75 53,44.75 52.25,45.5 BUFF_SL.7 52.25,45.75 53,46.5 v53,55 | 53,28.75 53,22.5 52.25,21.75 NOR.8 | 53,28.75 v52.75,28.75
R5
  Top 0.152: LED22.A 80.75,60.75 79.5,59.5 60.25,59.5 60,59.25 51.25,59.25 49.75,60.75 BUFF_SR.6 | ALU1.F1 20.5,47 21.5,48 31.25,48 31.5,48.25 39,48.25 41,46.25 41,44 53,44 54.5,45.5 BUFF_SL.8
  Bottom 0.152: BUFF_SL.8 54.5,45.5 53.5,44.5 53.5,21 52.5,20 49.75,20 49.75,21.5 NOR.9 49.75,21.75 51.75,23.75 51.75,30 52,30.25 BUFF_R.7 52,30.5 51,31.5 51,39.25 50.5,39.75 50.5,60 49.75,60.75 BUFF_SR.6
R6
  Top 0.152: LED23.A 81,63.5 82.5,65 82.5,67.25 75.75,67.25 73,64.5 55.75,64.5 52.25,61 BUFF_SR.7 | NOR.11 44.25,21.75 37.25,28.75 36.5,28.75 35.75,29.5 35.75,32.25 52.75,32.25 54.5,30.5 BUFF_R.8 | ALU1.F2 20.5,44.5 21.5,45.5 35,45.5 37,43.5 55,43.5 57,45.5 BUFF_SL.9
  Bottom 0.152: BUFF_R.8 54.75,30.5 56.25,32 56.25,44.75 57,45.5 BUFF_SL.9 57,45.75 57,48 55.75,49.25 55.75,70.25 54.25,70.25 53,69 53,61.75 52.25,61 BUFF_SR.7
R7  (via drill 0.35)
  Top 0.152: LED24.A 80.75,66 78.25,63.5 REG_FLAGS.14 72.25,63.5 71.25,62.5 63.75,62.5 63.5,62.75 56.5,62.75 54.75,61 BUFF_SR.8 | NOR.12 31.5,32 v29.5,32 | BUFF_R.9 57,30.5 57,34 41.5,34 37.75,37.75 37.75,41.75 28,41.75 ALU1.F3
  Bottom 0.152: v29.5,32 29.5,40.25 28,41.75 ALU1.F3 | REG_FLAGS.14 72.25,63.5 70.75,65 61.25,65 61.25,34.5 57.25,30.5 BUFF_R.9
S0  (via drill 0.35)
  Top 0.152: v10.75,14 7.25,14 6,12.75 LED29.A
  Bottom 0.152: 22,14 v10.75,14 | 22,23.75 22,14 | 22,23.75 20.5,25.25 ALU0.S0 | 22,23.75 22,55.5 20.5,57 ALU1.S0 | 22,14 23.5,12.5 23.5,2.5 89.75,2.5 94.75,7.5 94.75,27.25 96,28.5 JP2.30
S1  (via drill 0.35)
  Top 0.152: v8,16 6.75,16 6,15.25 LED30.A | v17.25,25.25 19.75,27.75 20.25,27.75 ALU0.S1 | JP2.32 96.25,26.25 98.25,28.25 98.25,72 43.25,72 40.5,69.25 40.5,63.25 31,63.25 28.5,60.75 21.5,60.75 20.5,59.75 ALU1.S1
  Bottom 0.152: v8,16 v17.25,25.25 17.25,56.5 20.25,59.5 ALU1.S1
S2  (via drill 0.35)
  Top 0.152: v8,20 6,18 LED31.A | v15.75,27.75 18.25,30.25 20.25,30.25 ALU0.S2 20.5,30.5 21.5,30.5 v22.75,31.75 | v24.75,9.25 29,9.25 29.75,10 92,10 92,15.75 93.25,17 94.75,17 94.75,22 96,23.25 JP2.34
  Bottom 0.152: v15.75,27.75 v8,20 | ALU1.S2 20.5,62 22.75,59.75 v22.75,31.75 22.75,20 24,18.75 24,10 v24.75,9.25
S3  (via drill 0.35)
  Top 0.152: v11,22 7.5,22 6,20.5 LED32.A | v16.5,32.75 16.75,33 20.25,33 ALU0.S3 20.5,33.25 21.25,34 29,34 29.75,33.25 55.5,33.25 55.5,30 61.5,24 91.5,24 92,24.5 97.5,24.5 97.5,22.25 96.25,21 JP2.36
  Bottom 0.152: v11,22 16.5,27.5 v16.5,32.75 10,39.25 10,54.5 20.25,64.75 ALU1.S3
VCC  (via drill 0.35)
  Top 0.508: JP2.3 93.75,61.75 96,61.75 JP2.4 96,62 96,64 JP2.2 | JP2.1 93.5,64.25 89.25,68.5 72.5,68.5 REG_FLAGS.16 | LED38.A 81,12.75 81,15 LED37.A 81,15.25 81,17.75 LED35.A 81,18 81,19.25 | 81,19.25 81,20.25 LED34.A | 81,19.25 70,19.25 C8.1 69.75,19 66.25,19 AND.14 66,19.25 65,20.25 54,20.25 52.5,18.75 33.75,18.75 31.75,16.75 C5.1 | v34.5,20.75 35.25,21.5 36.75,21.5 NOR.14 | BUFF_R.20 36.75,38 31.75,38 C7.1 | C2.1 31.75,69.75 35.75,69.75 36.75,68.75 BUFF_SR.20 43.25,75 71,75 72.25,73.75 C3.1 | BUFF_SR.1 36.75,61 31.75,61 C6.1 | BUFF_SL.20 36.75,53.25 35.75,52.25 31.75,52.25 C10.1
  Bottom 0.508: NOT.14 72.5,40.75 72.5,45.5 C4.1 72.25,45.75 70.5,47.5 70.5,58.75 71.5,59.75 74.25,59.75 74.25,66.75 72.5,68.5 REG_FLAGS.16 72.5,68.75 72.5,73.5 C3.1 | JP2.1 93.75,64.25 96,64.25 JP2.2 | C1.+ 85,5.25 71.25,19 70,19 C8.1 | NOR.14 36.75,21.75 36.75,30.25 BUFF_R.1 36.75,30.5 36.75,38 BUFF_R.20 36.75,38.25 36.75,45.5 BUFF_SL.1 36.75,45.75 36.75,53.25 BUFF_SL.20 36.75,53.5 36.75,60.75 BUFF_SR.1 36.75,61 36.75,68.5 BUFF_SR.20 | v34.5,20.75 34.5,19.5 31.75,16.75 C5.1 | C7.1 C9.1
Z
  Bottom 0.152: AND.8 66.25,4 68.25,6 68.25,16.25 66.5,18 62.5,18 62.5,63.25 63.75,64.5 70.75,64.5 70.75,62.5 72.25,61 REG_FLAGS.13

## Text on the board
tPlace: Operand X | Result | 7 | 6 | 7 | 5 | 6 | 4 | 5 | 3 | 4 | 2 | 3 | 1 | 2 | 0 | 1 | 0 | Operand Y | 7 | 6 | Flags | 5 | P | 4 | C | 3 | Z | 2 | N | 1 | 0 | Operation | Control | S3 | WR FL | S2 | RD RES | S1 | RD SL | S0 | RD SR | M | Cin